# Allegro board SATROT-2-2.brd
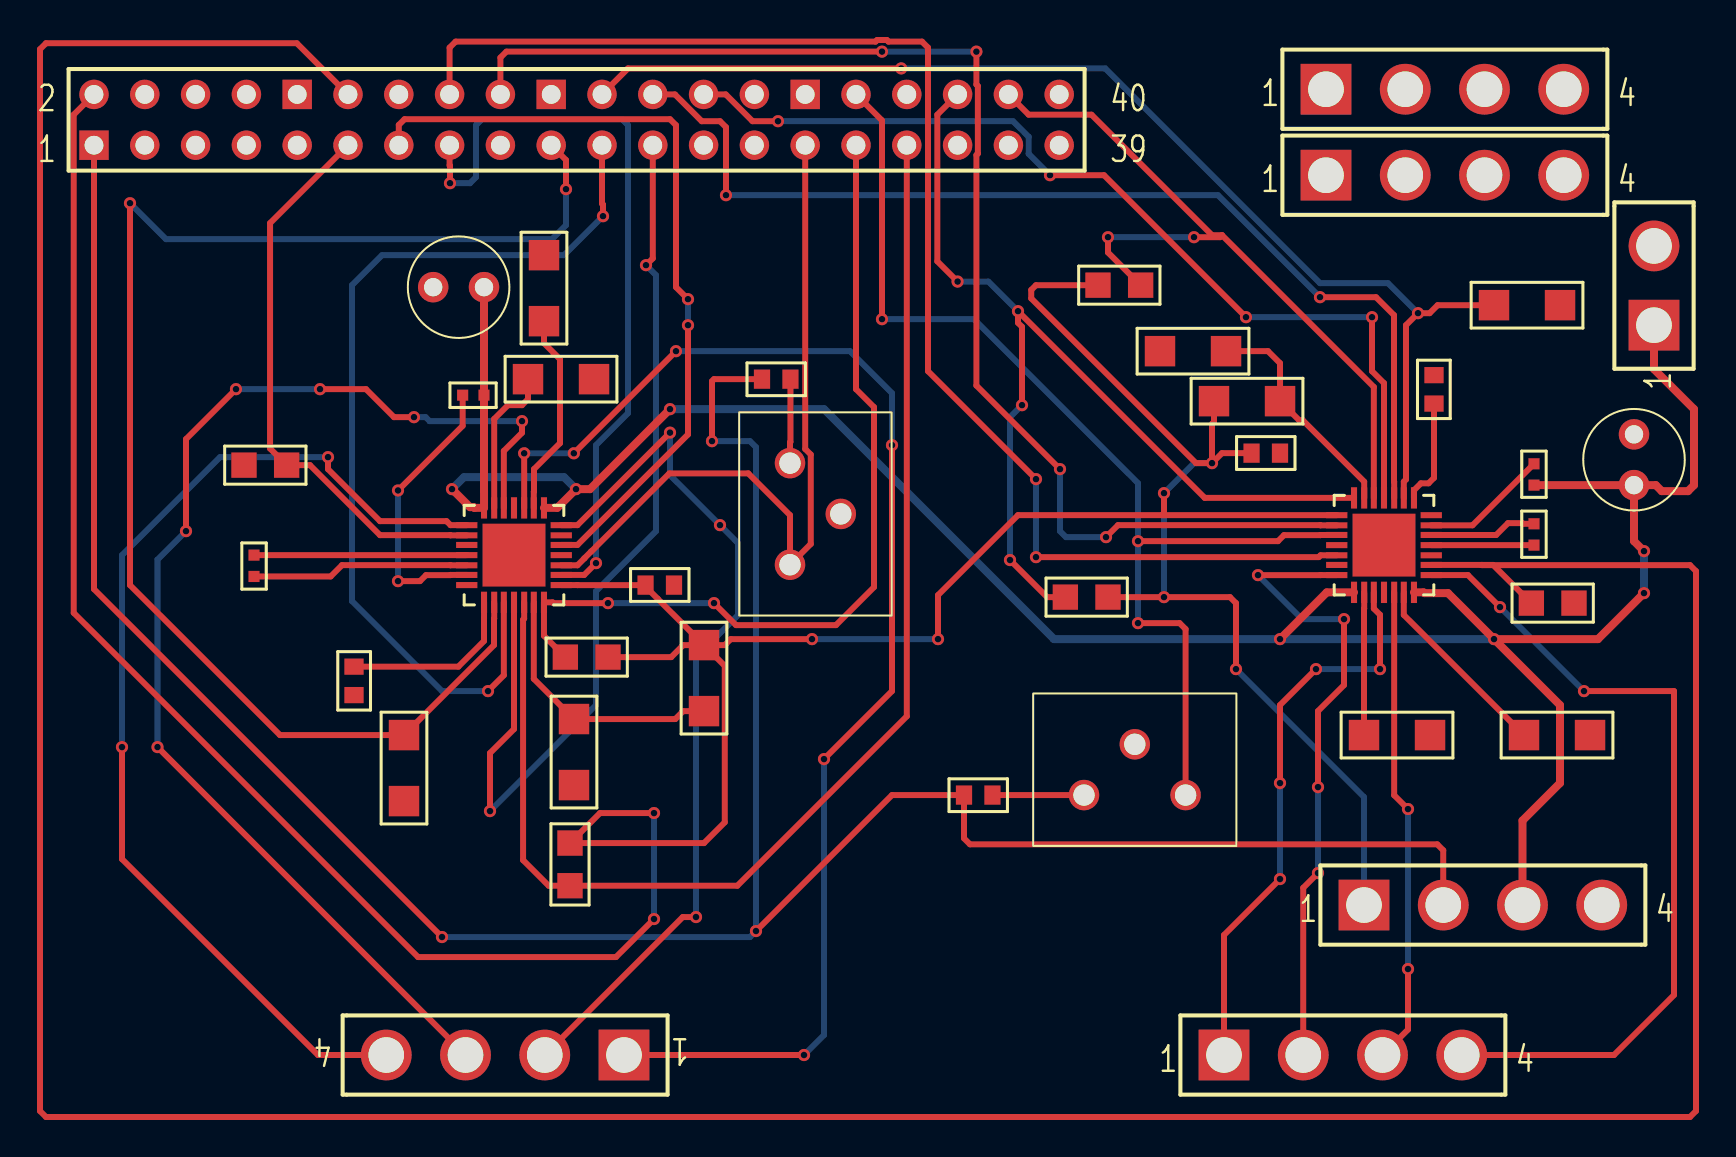
[diagram p0: board, top side]
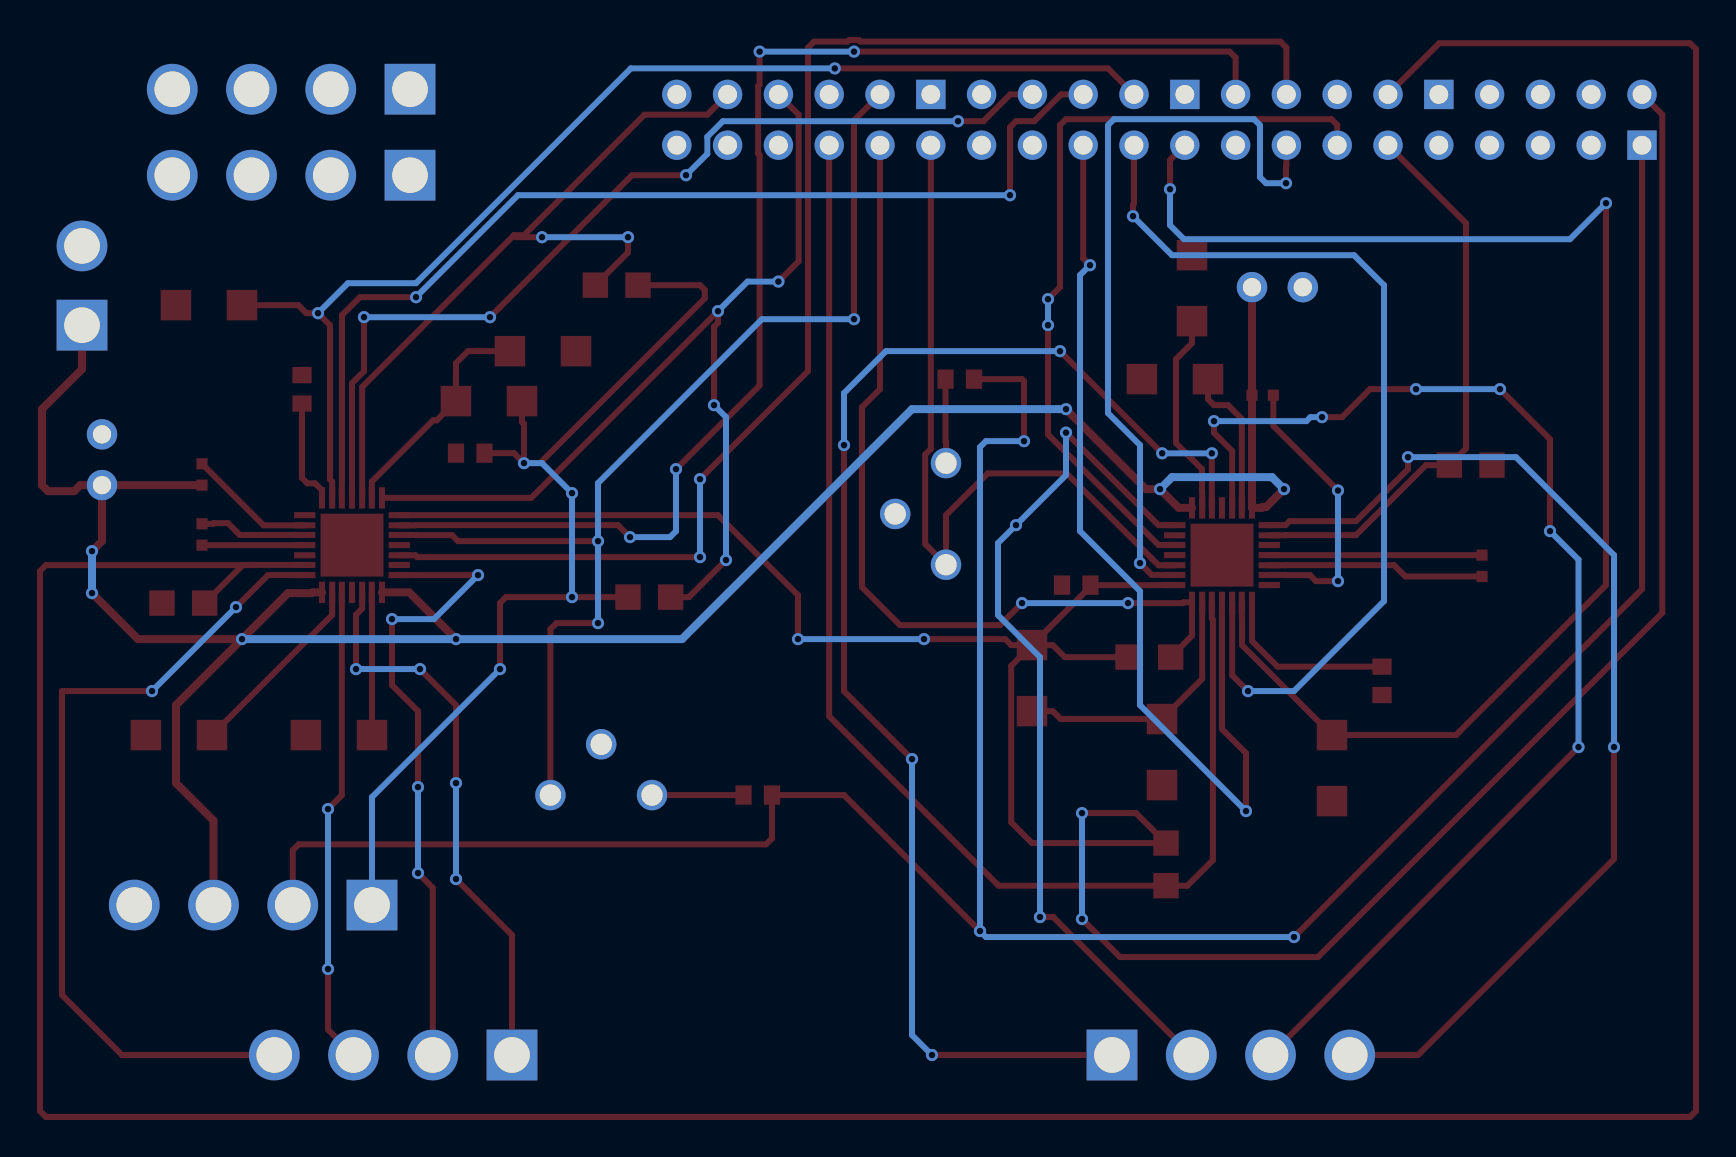
[diagram p1: board, bottom side, seen from below]

No outline. copper layers: TOP, BOTTOM. Coordinates in mm from the lowest, leftmost part position.

## Design rules (mm)
constraint set DEFAULT: min track width 0.3

## Placement (name value [footprint] x y rotation side)
C1  0.1 uF  [SMC0402]  8 25 270 top
C2  0.22 uF  [SMC0603]  13 18 90 top
C3  0.1 uF  [SMC0402]  19.5 33 180 top
C4  100 uF  [CAP196]  19.5 38.4 90 top
C5  0.22 uF  [SMC0603]  29 23.5 180 top
C6  0.1 uF  [SMC0402]  72 25.5 90 top
C7  0.22 uF  [SMC0603]  67 34 270 top
C8  0.1 uF  [SMC0402]  72 28.5 90 top
C9  100 uF  [CAP196]  77 28.5 0 top
C10  0.22 uF  [SMC0603]  59.3 30.1 180 top
J1  Raspberry Pi headers  [BLKCON100VHTM2OEW20040]  0 45.5 0 top
J2  Az Stepper  [BLKCON156VHTM1SQSW1564]  26.5 0 180 top
J3  Motor Power  [BLKCON156VHTM1SQSW1562]  78 36.5 90 top
J4  Power Connector  [BLKCON156VHTM1SQSW1564]  63.5 7.5 0 top
J5  El Stepper  [BLKCON156VHTM1SQSW1564]  56.5 0 0 top
J6  R_PINs  [BLKCON156VHTM1SQSW1564]  61.6 48.3 0 top
J7  L_PINs  [BLKCON156VHTM1SQSW1564]  61.6 44 0 top
R1  10K  [SMR1206]  24 13.5 90 top
R2  NP  [SMR1206]  30.5 20.5 270 top
R3  100k  [SMR0805]  23.8 10.6 270 top
R4  100k  [SMR0805]  25.7 19.9 180 top
R5  10K POT  [POT]  34.8 29.6 270 top
R6  20K  [SMR0603]  33.4 33.8 0 top
R7  NP  [SMR1206]  15.5 16 270 top
R8  100k  [SMR0805]  7.5 29.5 0 top
R9  0.05  [SMR1206]  22.5 36.7 90 top
R10  0.05  [SMR1206]  21.7 33.8 0 top
R11  10K  [SMR1206]  53.3 35.2 0 top
R12  NP  [SMR1206]  56 32.7 0 top
R13  100k  [SMR0805]  50.2 38.5 0 top
R14  100k  [SMR0805]  50.7 22.9 180 top
R15  10K POT  [POT]  49.5 13 0 top
R16  20K  [SMR0603]  43.5 13 0 top
R17  NP  [SMR1206]  70 37.5 0 top
R18  100k  [SMR0805]  74 22.6 180 top
R19  0.05  [SMR1206]  63.5 16 0 top
R20  0.05  [SMR1206]  71.5 16 0 top
U1  A4988SETTR-T  [QFN50P500X500X100-29N]  21 25 0 top
U2  A4988SETTR-T  [QFN50P500X500X100-29N]  64.5 25.5 180 top

## Library data of the parts
C1-C3 C5-C8 C10 = CAP NP
C4 C9 = CAP POL: Tolerance: ***; User Part Number: ***
J1 = HEADER 20x2/SM
J2 J4-J7 = 4 HEADER
J3 = CON2
R1-R4 R6-R14 R16-R20 = R
R5 R15 = POT: User Part Number: ***
U1 U2 = A4988SETTR-T

## Footprints (pads in the part's own frame, mm; a bottom-side part is the same pattern mirrored in y, then rotated)
BLKCON100VHTM2OEW20040
  rect 1.473x1.473 hole 0.94: 1(0,0) 10(10.16,2.54) 20(22.86,2.54) 30(35.56,2.54)
  round 1.473 hole 0.94: 2(0,2.54) 3(2.54,0) 4(2.54,2.54) 5(5.08,0) 6(5.08,2.54) 7(7.62,0) 8(7.62,2.54) 9(10.16,0) 11(12.7,0) 12(12.7,2.54) 13(15.24,0) 14(15.24,2.54) 15(17.78,0) 16(17.78,2.54) 17(20.32,0) 18(20.32,2.54) 19(22.86,0) 21(25.4,0) 22(25.4,2.54) 23(27.94,0) 24(27.94,2.54) 25(30.48,0) 26(30.48,2.54) 27(33.02,0) 28(33.02,2.54) 29(35.56,0) 31(38.1,0) 32(38.1,2.54) 33(40.64,0) 34(40.64,2.54) 35(43.18,0) 36(43.18,2.54) 37(45.72,0) 38(45.72,2.54) 39(48.26,0) 40(48.26,2.54)
BLKCON156VHTM1SQSW1562
  rect 2.54x2.54 hole 1.778: 1(0,0)
  round 2.54 hole 1.778: 2(3.962,0)
BLKCON156VHTM1SQSW1564
  rect 2.54x2.54 hole 1.778: 1(0,0)
  round 2.54 hole 1.778: 2(3.962,0) 3(7.925,0) 4(11.887,0)
CAP196
  round 1.524 hole 0.914: 1(0,0) 2(0,2.54)
POT
  round 1.524 hole 1.067: 1(0,0) 2(5.08,0) 3(2.54,2.54)
QFN50P500X500X100-29N
  rect 1.067x0.305 smd: 1(-2.362,1.499) 2(-2.362,0.991) 3(-2.362,0.508) 4(-2.362,0) 5(-2.362,-0.508) 6(-2.362,-0.991) 7(-2.362,-1.499) 15(2.362,-1.499) 16(2.362,-0.991) 17(2.362,-0.508) 18(2.362,0) 19(2.362,0.508) 20(2.362,0.991) 21(2.362,1.499)
  rect 0.305x1.067 smd: 8(-1.499,-2.362) 9(-0.991,-2.362) 10(-0.508,-2.362) 11(0,-2.362) 12(0.508,-2.362) 13(0.991,-2.362) 14(1.499,-2.362) 22(1.499,2.362) 23(0.991,2.362) 24(0.508,2.362) 25(0,2.362) 26(-0.508,2.362) 27(-0.991,2.362) 28(-1.499,2.362)
  rect 3.15x3.15 smd: 29(0,0)
SMC0402
  rect 0.559x0.559 smd: 1(0,0) 2(1.067,0)
SMC0603
  rect 0.813x0.965 smd: 1(0,0) 2(1.422,0)
SMR0603
  rect 0.813x0.965 smd: 1(0,0) 2(1.422,0)
SMR0805
  rect 1.27x1.27 smd: 1(0,0) 2(2.134,0)
SMR1206
  rect 1.524x1.524 smd: 1(0,0) 2(3.302,0)

## Nets
3V3: J1.1 J4.2 R6.1 R16.1
GND: C2.1 C4.2 C5.1 C7.1 C9.2 C10.1 J1.9 J3.2 J4.4 R1.1 R5.3 R7.2 R8.1 R9.2 R10.2 R11.1 R15.3 R17.2 R18.1 R19.2 R20.2 U1.3 U1.18 U1.29 U2.3 U2.18 U2.29
VDD: C5.2 C10.2 J1.2 J4.1 R2.1 R3.1 R4.1 R12.1 R13.1 R14.1 U1.15 U2.15
7/GPIO: J1.7 J7.1
19/GPIO: J1.35 J7.3
27/RESERVED: J1.27 J7.2
28/RESERVED: J1.28 J6.3
37/GPIO: J1.37 J7.4
GPIO: J1.40 J6.4
GPIO/RX: J1.10 J6.2
GPIO/TX: J1.8 J6.1
VMM: C3.1 C4.1 C8.1 C9.1 J3.1 J4.3 U1.22 U1.28 U2.22 U2.28
N00486: J2.1 U1.24
N00488: J2.2 U1.21
N00490: J2.3 U1.26
N00492: J2.4 U1.1
N00665: R1.2 R2.2 U1.13
N00675: J1.33 R3.2 U1.12
N00682: J1.31 R4.2 U1.14(~SLEEP)
N00813: R5.1 R6.2
N01051: J1.29 R5.2(WIPER) U1.17
N01158: J1.11 R8.2 U1.2
N01167: J1.19 R7.1 U1.9
N01261: R10.1 U1.27
N01273: R9.1 U1.23
N01454: C1.1 U1.4
N01461: C1.2 U1.5
N01528: C2.2 U1.8
N01594: C3.2 U1.6
N04587: J5.1 U2.24
N04591: J5.2 U2.21
N04595: J5.3 U2.26
N04599: J5.4 U2.1
N04699: R11.2 R12.2 U2.13
N04707: J1.38 R13.2 U2.12
N04715: J1.36 R14.2 U2.14(~SLEEP)
N04769: R15.1 R16.2
N04789: J1.32 R15.2(WIPER) U2.17
N04853: J1.12 R18.2 U2.2
N04861: J1.22 R17.1 U2.9
N04909: R20.1 U2.27
N04921: R19.1 U2.23
N04961: C6.1 U2.4
N04969: C6.2 U2.5
N04997: C7.2 U2.8
N05017: C8.2 U2.6
N05607: J1.13 U1.19
N05619: J1.15 U1.16
N05647: J1.21 U1.10
N05659: J1.23 U1.11
N05688: J1.16 U2.19
N05701: J1.18 U2.16
N05727: J1.24 U2.10
N05740: J1.26 U2.11
N09636: J1.3
N09640: J1.5

Pads without a net: J1 4 6 14 17 20 25 30 34 39; U1 7 20 25; U2 7 20 25

## Via types
v1: diameter 0.61, hole 0.33, TOP to BOTTOM, 84 vias

## Routing (per net, layer and track width the routed paths; a pad name or vN(x,y) marks a point on that pad's centre or on a via; arc(x,y) is an arc through that point)
3V3: length 137
  TOP w0.3: v1(30.9,30.7) 30.9,33.7 31,33.8 R6.1 ; J1.1 0,23.3 v1(17.4,5.9) ; J4.2 67.46,10.24 67.16,10.54 43.8,10.54 43.5,10.84 R16.1 39.9,13 v1(33.1,6.2)
  BOTTOM w0.3: v1(17.4,5.9) 32.8,5.9 v1(33.1,6.2) 33.1,30.4 32.8,30.7 v1(30.9,30.7)
VDD: length 195.2
  TOP w0.3: v1(55.9,29.6) 55.1,29.6 46.86,37.84 46.86,38.26 47.1,38.5 R13.1 ; v1(55.9,29.6) 56.4,30.1 C10.2 ; v1(55.9,29.6) 55.9,31.56 56,31.66 R12.1 ; R14.1 v1(53.5,22.9) 56.8,22.9 57.1,22.6 v1(57.1,19.3) ; J1.2 -1.01,47.03 -1.01,22.11 16.2,4.9 26.1,4.9 v1(28,6.8) ; R2.1 29.46,20.5 28.86,19.9 R4.1 ; R2.1 31.54,20.5 31.84,20.8 v1(35.9,20.8) ; R2.1 31.54,19.46 31.54,11.64 30.5,10.6 R3.1 25.3,12.1 v1(28,12.1) ; R2.1 28.18,22.82 28.18,22.82 27.58,23.42 C5.2 24.17,23.5 24.17,23.5 U1.15 ; 53.4,27 53.5,27.1 v1(53.5,28.1) ; 53.4,27 46.2,27 42.2,23 v1(42.2,20.8) ; 53.4,27 U2.15
  BOTTOM w0.3: v1(42.2,20.8) v1(35.9,20.8) ; v1(28,6.8) v1(28,12.1) ; v1(57.1,19.3) 63.5,12.9 J4.1 ; v1(53.5,22.9) v1(53.5,28.1) 55,29.6 v1(55.9,29.6)
VMM: length 130.3
  TOP w0.4: C8.1 C9.1 ; C9.1 77,25.7 v1(77.5,25.2) ; C9.1 78.09,28.5 78.39,28.2 79.7,28.2 80,28.5 80,32.3 78,34.3 J3.1 ; v1(59.3,20.8) 61.64,23.14 U2.22 ; v1(17.9,28.3) 18.8,27.4 18.98,27.4 19.02,27.36 U1.28 19.5,28.22 19.5,28.22 C3.1 C4.1 ; U2.28 66.48,23.14 66.52,23.1 67.7,23.1 v1(70,20.8) ; v1(70,20.8) 73.3,17.5 73.3,13.6 71.42,11.72 J4.3 ; v1(70,20.8) 75.2,20.8 v1(77.5,23.1) ; U1.22 23.16,27.36 v1(24.1,28.3) 24.8,28.3 v1(28.8,32.3)
  BOTTOM w0.4: v1(24.1,28.3) 23.5,28.9 18.5,28.9 v1(17.9,28.3) ; v1(28.8,32.3) 36.5,32.3 48,20.8 v1(59.3,20.8) v1(70,20.8) ; v1(77.5,23.1) v1(77.5,25.2)
N00486: length 68
  TOP w0.3: v1(36.5,14.8) 39.9,18.2 v1(39.9,30.5) ; v1(23.99,30.09) v1(29.1,35.2) ; v1(35.5,0) J2.1 ; U1.24 v1(21.51,30.09)
  BOTTOM w0.3: v1(29.1,35.2) 37.8,35.2 39.9,33.1 v1(39.9,30.5) ; v1(36.5,14.8) 36.5,1 v1(35.5,0) ; v1(21.51,30.09) v1(23.99,30.09)
N00488: length 44.3
  TOP w0.3: U1.21 24.17,26.5 v1(28.8,31.13) ; J2.2 29.44,6.9 v1(30.1,6.9)
  BOTTOM w0.3: v1(30.1,6.9) 30.1,19.9 32.2,22 32.2,25.6 v1(31.3,26.5) 28.8,29 v1(28.8,31.13)
N00490: length 61
  TOP w0.3: v1(7.1,33.3) 4.6,30.8 v1(4.6,26.2) ; U1.26 20.49,30.21 21.4,31.12 v1(21.4,31.7) ; v1(11.3,33.3) 13.6,33.3 15,31.9 v1(16,31.9) ; J2.3 v1(3.18,15.4)
  BOTTOM w0.3: v1(16,31.9) 16.58,31.9 16.78,31.7 v1(21.4,31.7) ; v1(4.6,26.2) 3.18,24.78 v1(3.18,15.4) ; v1(7.1,33.3) v1(11.3,33.3)
N00492: length 53.5
  TOP w0.3: J2.4 11.2,0 1.4,9.8 v1(1.4,15.4) ; v1(11.7,29.9) 11.7,29.3 14.3,26.7 17.63,26.7 17.83,26.5 U1.1
  BOTTOM w0.3: v1(11.7,29.9) 6.3,29.9 1.4,25 v1(1.4,15.4)
N00665: length 13.3
  TOP w0.3: U1.13 21.99,18.81 R1.2 29.06,16.8 29.46,17.2 R2.2
N00675: length 64.7
  TOP w0.3: J1.33 40.64,16.94 32.17,8.47 R3.2 22.73,8.47 21.45,9.75 21.45,21.77 21.51,21.83 U1.12
N00682: length 43.4
  TOP w0.3: R4.2 22.5,20.97 U1.14 22.93,22.64 22.97,22.6 v1(25.7,22.6) ; v1(31,22.6) 32.1,21.5 37.1,21.5 39,23.4 39,32.4 38.1,33.3 J1.31
  BOTTOM w0.3: v1(31,22.6) v1(25.7,22.6)
N00813: length 4.2
  TOP w0.3: R5.1 34.8,30.64 34.82,30.66 R6.2
N01051: length 38.2
  TOP w0.3: J1.29 35.56,30.31 35.84,30.03 35.84,25.56 R5.2 34.8,27 32.71,29.09 28.77,29.09 24.86,25.18 24.86,25.18 24.52,24.84 24.52,24.84 24.17,24.49 U1.17
N01158: length 28.4
  TOP w0.3: U1.2 17.83,25.99 17.82,26 14.3,26 10.8,29.5 R8.2 8.8,30.33 8.8,41.6 J1.11
N01167: length 71.6
  TOP w0.3: v1(23.6,43.3) 23.6,44.76 J1.19 ; U1.9 20.01,21.83 20,21.82 20,20.5 R7.1 9.3,16 1.8,23.5 v1(1.8,42.6)
  BOTTOM w0.3: v1(1.8,42.6) 3.6,40.8 22.9,40.8 23.6,41.5 v1(23.6,43.3)
N01261: length 7.5
  TOP w0.3: U1.27 20.01,31.81 20.7,32.5 21.4,32.5 21.7,32.8 R10.1
N01273: length 10.2
  TOP w0.3: U1.23 21.99,28.17 22,28.18 22,29.3 23.3,30.6 23.3,34.8 22.5,35.6 R9.1
N01454: length 10.6
  TOP w0.3: C1.1 U1.4
N01461: length 10.9
  TOP w0.3: C1.2 11.83,23.93 12.4,24.5 17.82,24.5 17.83,24.49 U1.5
N01528: length 9
  TOP w0.3: C2.2 18.22,19.42 19.5,20.7 19.5,21.83 19.5,21.83 U1.8
N01594: length 14.2
  TOP w0.3: v1(15.2,23.7) 16.3,23.7 16.6,24 17.82,24 17.83,24.01 U1.6 ; C3.2 18.43,31.47 v1(15.2,28.23)
  BOTTOM w0.3: v1(15.2,28.23) v1(15.2,23.7)
N04587: length 28.4
  TOP w0.3: v1(59.3,13.6) 59.3,17.5 v1(61.1,19.3) ; U2.24 63.99,22.33 64.3,22.02 v1(64.3,19.3) ; J5.1 56.5,6 v1(59.3,8.8)
  BOTTOM w0.3: v1(61.1,19.3) v1(64.3,19.3) ; v1(59.3,8.8) v1(59.3,13.6)
N04591: length 31.8
  TOP w0.3: J5.2 60.46,8.36 v1(61.2,9.1) ; U2.21 61.33,24 61.33,24 v1(58.2,24) ; v1(61.2,13.4) 61.2,17.2 62.5,18.5 v1(62.5,21.8)
  BOTTOM w0.3: v1(61.2,9.1) v1(61.2,13.4) ; v1(62.5,21.8) 60.4,21.8 v1(58.2,24)
N04595: length 24
  TOP w0.3: J5.3 65.7,1.28 v1(65.7,4.3) ; U2.26 65.01,12.99 v1(65.7,12.3)
  BOTTOM w0.3: v1(65.7,12.3) v1(65.7,4.3)
N04599: length 41.6
  TOP w0.3: v1(70.3,22.4) 68.7,24 U2.1 ; v1(74.5,18.2) 79,18.2 79,3 76,0 J5.4
  BOTTOM w0.3: v1(70.3,22.4) v1(74.5,18.2)
N04699: length 11.5
  TOP w0.3: R11.2 58.7,35.2 59.3,34.6 59.3,33.74 59.3,33.74 R12.2 60.26,31.74 60.44,31.74 63.51,28.67 U2.13
N04707: length 38.7
  TOP w0.3: 56.4,41 55.9,41 49.87,47.03 46.73,47.03 J1.38 ; 56.4,41 56.3,40.9 v1(55,40.9) ; 56.4,41 63.99,33.41 U2.12 ; v1(50.7,40.9) 50.7,40.13 R13.2
  BOTTOM w0.3: v1(50.7,40.9) v1(55,40.9)
N04715: length 50.8
  TOP w0.3: R14.2 47.65,22.9 v1(45.8,24.75) ; J1.36 42.17,47.03 42.17,39.69 v1(43.18,38.68) ; v1(46.4,32.5) 46.4,36.42 46.2,36.62 v1(46.2,37.2) 55.54,27.86 U2.14
  BOTTOM w0.3: v1(43.18,38.68) 44.72,38.68 v1(46.2,37.2) ; v1(46.4,32.5) 45.8,31.9 v1(45.8,24.75)
N04769: length 4.6
  TOP w0.3: R16.2 R15.1
N04789: length 55.8
  TOP w0.3: R15.2 54.58,21.3 54.28,21.6 v1(52.2,21.6) ; v1(52.2,25.7) 59.2,25.7 59.5,26 61.32,26 61.33,26.01 U2.17 ; v1(39.4,36.8) 39.4,46.74 J1.32
  BOTTOM w0.3: v1(39.4,36.8) 44,36.8 52.2,28.6 v1(52.2,25.7) v1(52.2,21.6)
N04853: length 196.4
  TOP w0.3: 69.39,24.51 U2.2 ; 69.39,24.51 69.4,24.5 79.8,24.5 80.1,24.2 80.1,-2.8 79.8,-3.1 -2.4,-3.1 -2.7,-2.8 -2.7,50.3 -2.4,50.6 10.14,50.6 J1.12 ; 69.39,24.51 69.96,24.51 R18.2
N04861: length 59.9
  TOP w0.3: v1(40.36,49.34) 26.7,49.34 J1.22 ; U2.9 65.49,28.67 65.6,28.78 65.6,36.5 v1(66.2,37.1) 66.78,37.1 67.18,37.5 R17.1
  BOTTOM w0.3: v1(40.36,49.34) 50.56,49.34 61.3,38.6 64.7,38.6 v1(66.2,37.1)
N04909: length 9.6
  TOP w0.3: R20.1 65.49,22.01 U2.27
N04921: length 7.1
  TOP w0.3: U2.23 63.51,22.33 63.5,22.32 R19.1
N04961: length 5.1
  TOP w0.3: C6.1 U2.4
N04969: length 5.4
  TOP w0.3: C6.2 71.44,26.57 71.41,26.6 70.7,26.6 70.11,26.01 U2.5
N04997: length 5.4
  TOP w0.3: U2.8 66,28.24 66.35,28.59 66.73,28.59 67,28.86 C7.2
N05017: length 6.4
  TOP w0.3: C8.2 68.92,26.49 U2.6
N05607: length 39.5
  TOP w0.3: J1.13 15.24,46.51 15.53,46.8 28.8,46.8 29.1,46.5 29.1,38.4 v1(29.7,37.8) ; U1.19 24.17,25.51 29.7,31.04 v1(29.7,36.5)
  BOTTOM w0.3: v1(29.7,36.5) v1(29.7,37.8)
N05619: length 38.3
  TOP w0.3: v1(17.8,43.6) 17.8,44.47 17.78,44.49 J1.15 ; v1(25.1,24.6) 24.51,24.01 U1.16
  BOTTOM w0.3: v1(25.1,24.6) 25.1,30.5 26.7,32.1 26.7,46.5 26.4,46.8 19.4,46.8 19.1,46.5 19.1,43.9 18.8,43.6 v1(17.8,43.6)
N05647: length 47
  TOP w0.3: U1.10 20.49,18.99 v1(19.7,18.2) ; J1.21 25.4,42.58 25.45,42.53 v1(25.45,41.95)
  BOTTOM w0.3: v1(19.7,18.2) 17.4,18.2 12.9,22.7 12.9,38.5 14.4,40 23.5,40 v1(25.45,41.95) 25.5,42 ; J1.21 25.5,45.4
N05659: length 48
  TOP w0.3: U1.11 21,16.3 19.8,15.1 v1(19.8,12.2) ; v1(27.6,39.5) 27.94,39.84 J1.23
  BOTTOM w0.3: v1(27.6,39.5) 28.1,39 28.1,26.2 25.1,23.2 25.1,17.5 v1(19.8,12.2)
N05688: length 69.4
  TOP w0.3: v1(47.1,28.8) 41.7,34.2 41.7,50.38 41.4,50.68 39.72,50.68 39.64,50.76 39.16,50.76 39.08,50.68 18.08,50.68 17.78,50.38 J1.16 ; v1(47.1,24.9) 61.24,24.9 61.33,24.99 U2.19
  BOTTOM w0.3: v1(47.1,28.8) v1(47.1,24.9)
N05701: length 65.8
  TOP w0.3: U2.16 61.33,26.49 61.32,26.5 51.2,26.5 v1(50.6,25.9) ; v1(48.3,29.3) 44.12,33.48 44.12,45.01 44.19,45.08 44.19,48.46 44.12,48.53 v1(44.12,50.18) ; J1.18 20.32,49.88 20.62,50.18 v1(39.4,50.18)
  BOTTOM w0.3: v1(48.3,29.3) 48.3,26.2 48.6,25.9 v1(50.6,25.9) ; v1(39.4,50.18) v1(44.12,50.18)
N05727: length 52.8
  TOP w0.3: J1.24 29.05,48.04 30.39,46.7 31.3,46.7 31.6,46.4 v1(31.6,43) ; U2.10 65.01,28.67 65,28.68 65,37 64.1,37.9 v1(61.3,37.9)
  BOTTOM w0.3: v1(61.3,37.9) 56.2,43 v1(31.6,43)
N05740: length 47.8
  TOP w0.3: v1(47.8,44) 50.5,44 v1(57.6,36.9) ; U2.11 64.5,33.6 63.9,34.2 v1(63.9,36.9) ; J1.26 31.59,48.04 32.93,46.7 v1(34.2,46.7)
  BOTTOM w0.3: v1(47.8,44) 46.73,45.07 46.73,45.92 45.95,46.7 v1(34.2,46.7) ; v1(57.6,36.9) v1(63.9,36.9)
